# Altium PCB BrightnessControl.PcbDoc
Units mm, origin at the board's own origin, x right, y up, seen from the top; angles counter-clockwise.
Board outline 30.2 x 26.52 mm, 2 copper layers (Top Layer, Bottom Layer); 10 components, 10 nets, 30 pads, 2 vias.
Unrouted connection lines stored in the file: 1.
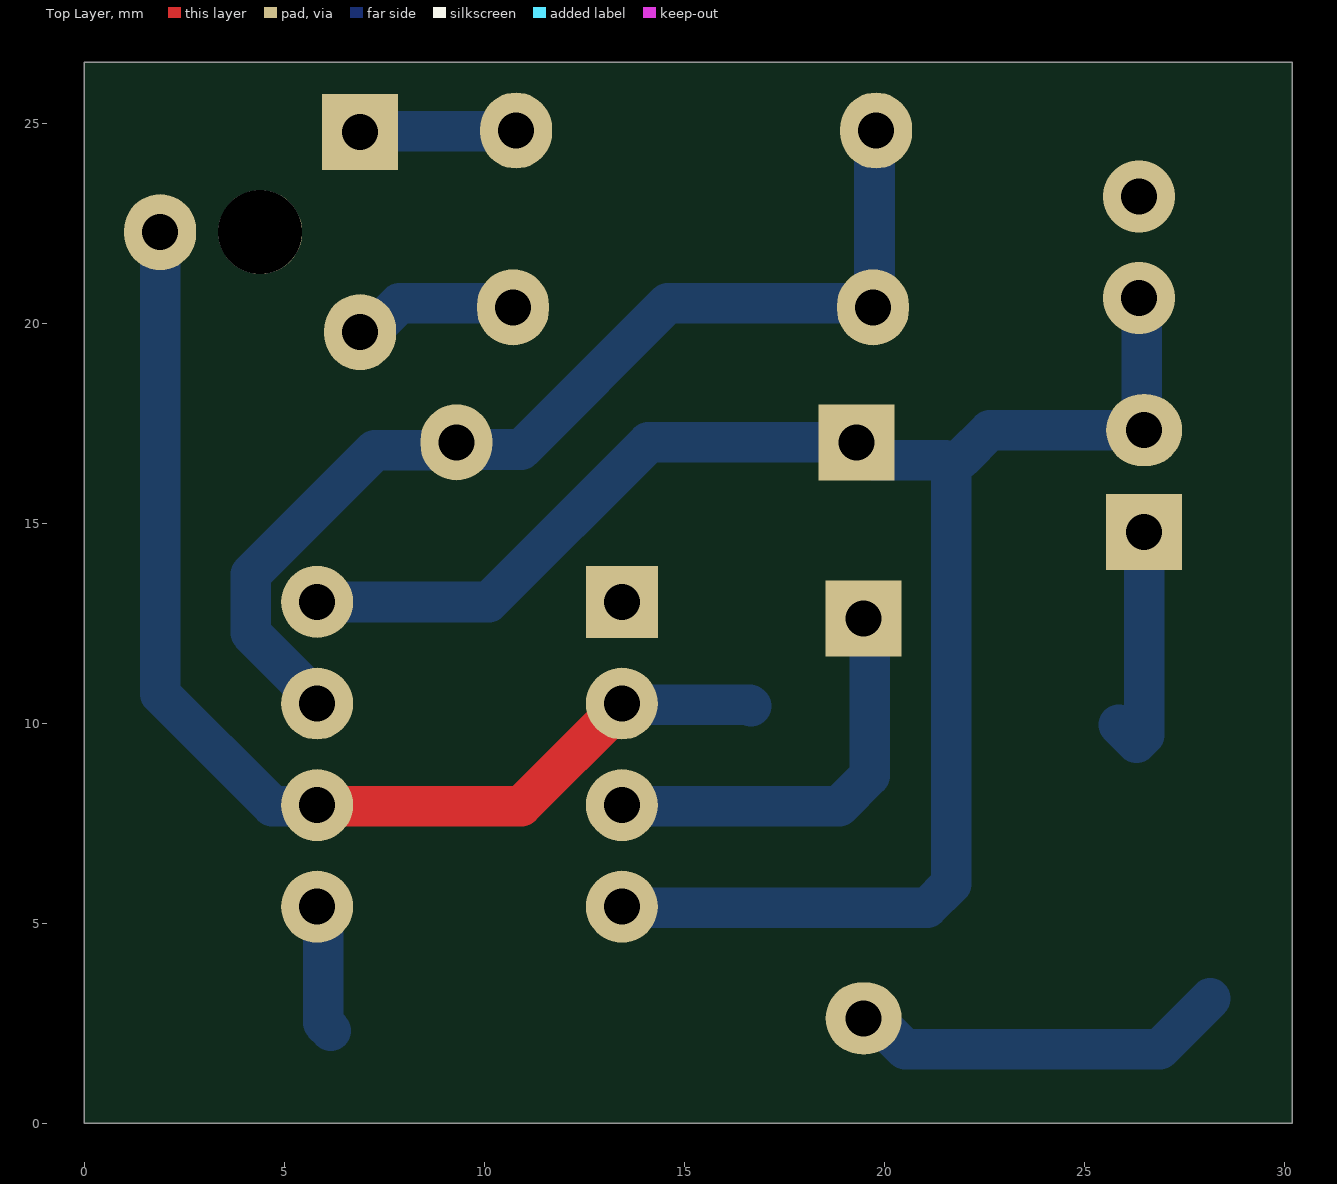
[diagram p0: Top Layer view]
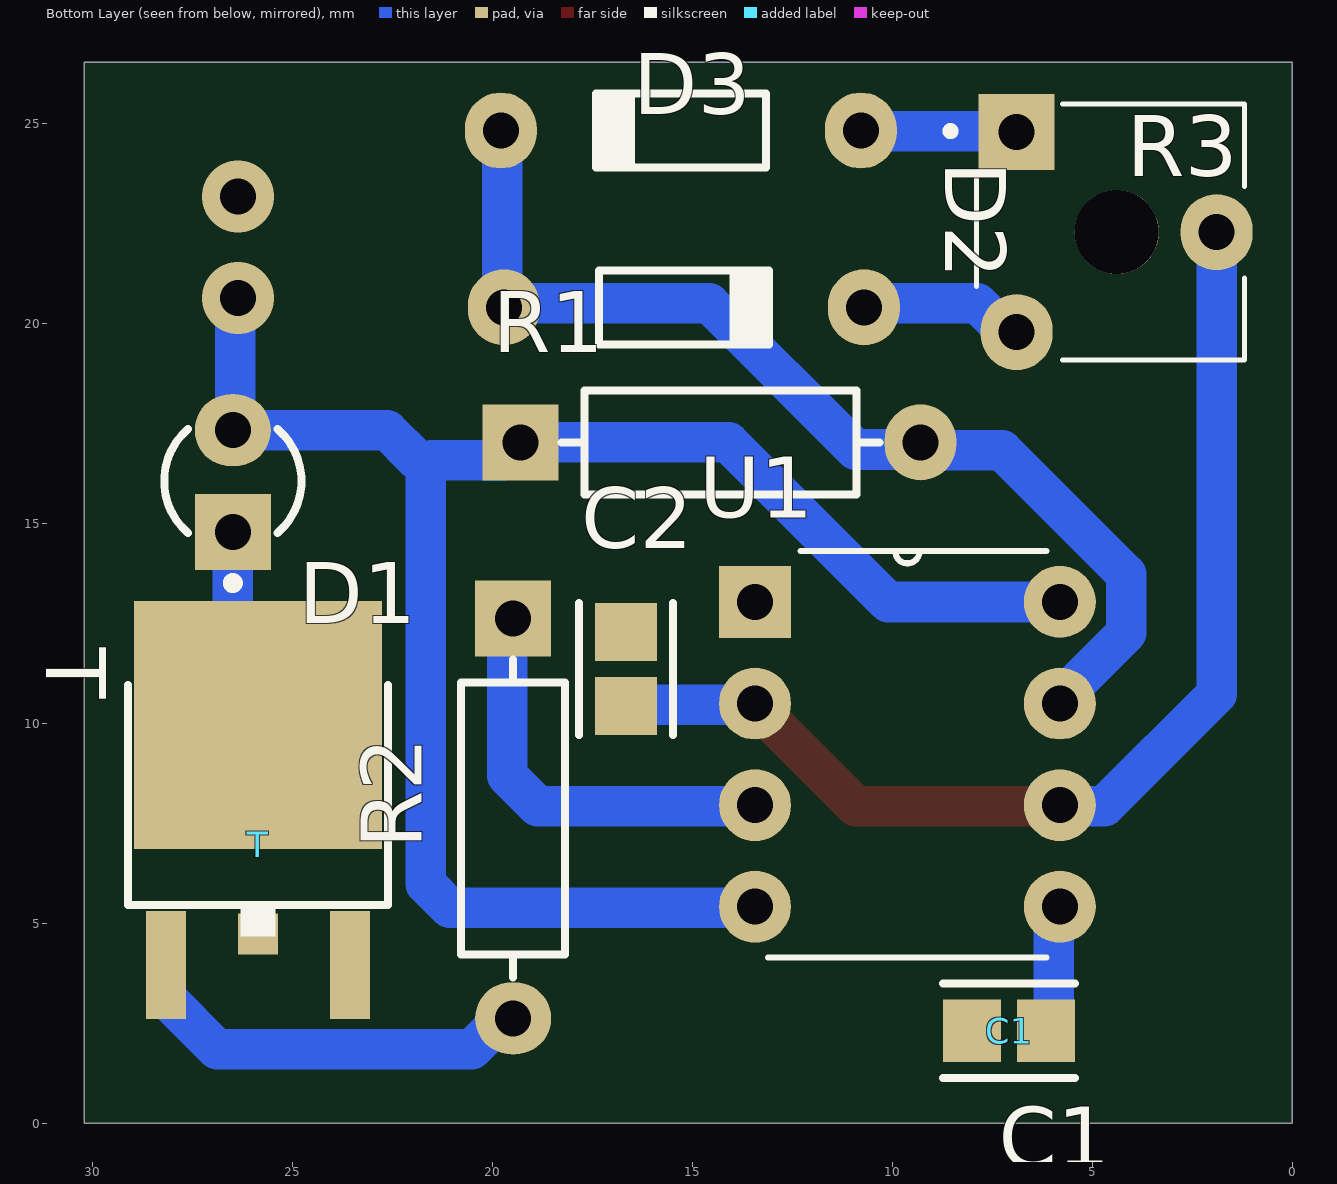
[diagram p1: Bottom Layer view, seen from below]
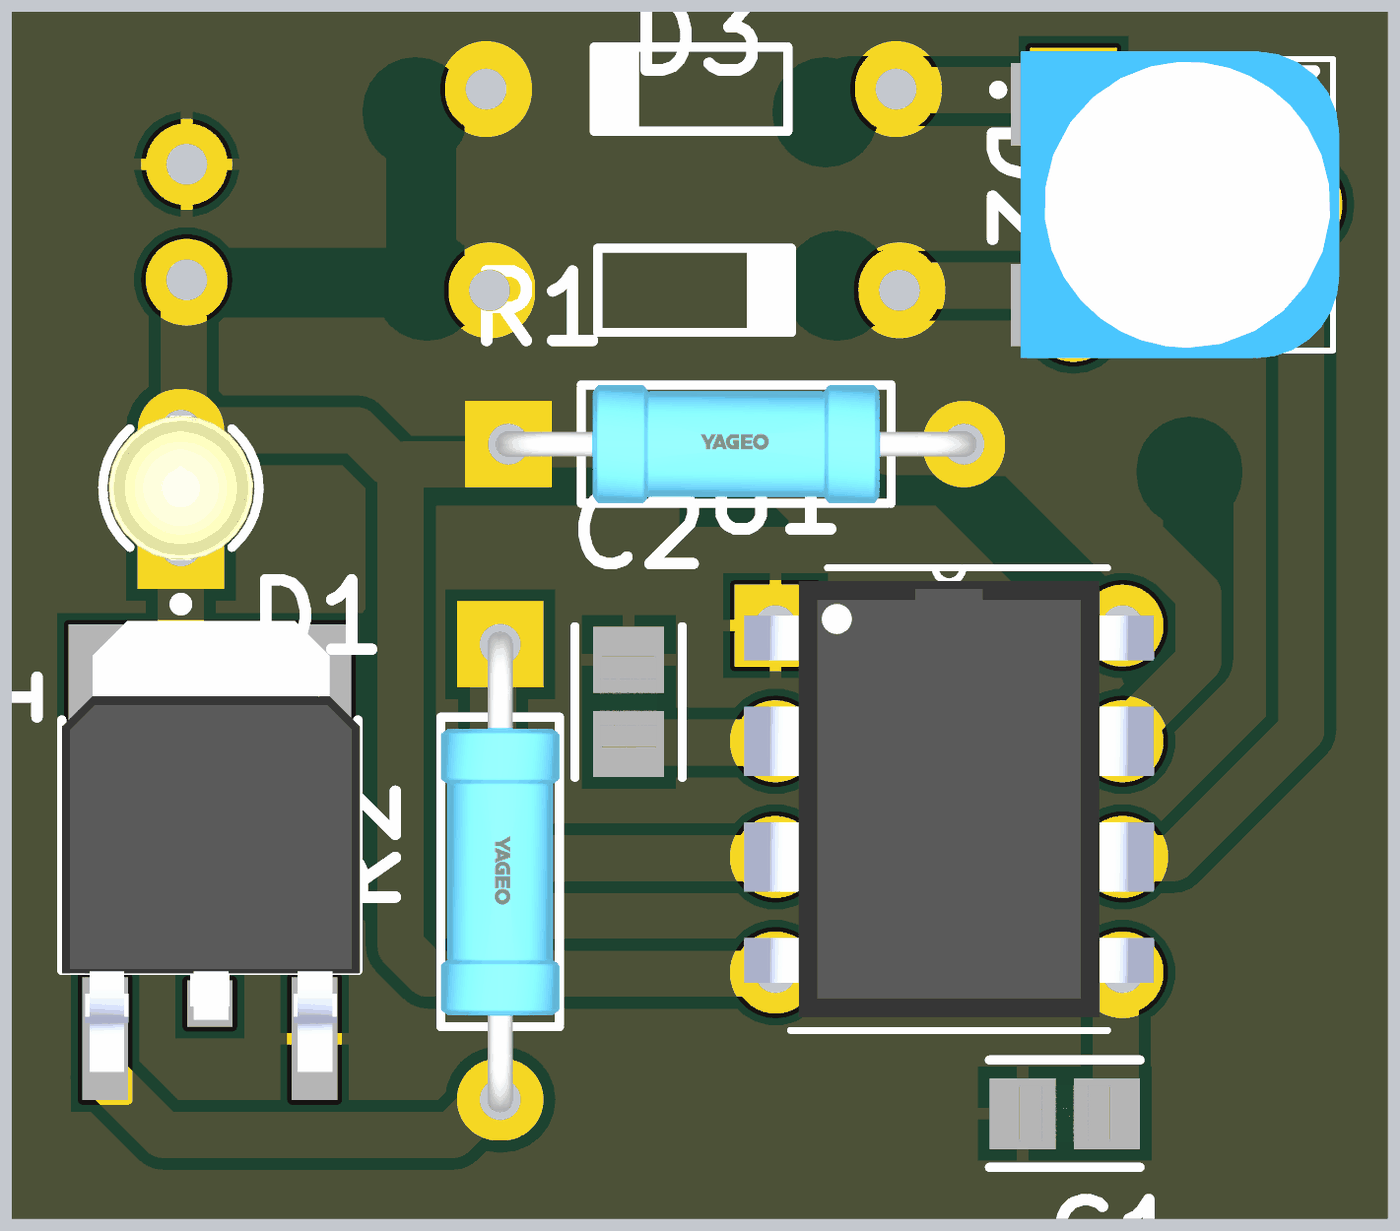
[diagram p2: 3D render of the assembled board from below, using the file's embedded part models]

## Layer stack, top to bottom
Top Solder: solder mask 0.0102, Solder Resist, Dk 3.5
Top Layer: signal copper 0.0356
Dielectric 1: dielectric 0.32, FR-4, Dk 4.8
Bottom Layer: signal copper 0.0356
Bottom Solder: solder mask 0.0102, Solder Resist, Dk 3.5

## Board outline
0,0 30.201,0 30.201,26.518 0,26.518

## Design rules (kind name [scope] priority, off if disabled: settings)
Clearance [All] p1: gap=0.254 ignorepadtopadclearanceinfootprint=FALSE except(0: Arc-Hole Track-Hole SMDPad-Hole THPad-Hole Via-Hole Fill-Hole Poly-Hole Region-Hole Text-Hole)
PolygonConnect [All] p1: connectstyle=Relief reliefconductorwidth=0.254 reliefentries=4 polygonreliefangle="90 Angle" airgapwidth=0.254
RoutingVias [All] p1: holewidth=0.711 width=1.27 viastyle="Through Hole" minholewidth=0.711 minwidth=1.27 maxholewidth=0.711 maxwidth=1.27
SolderMaskExpansion [All] p1: expansion=0.102 istentingtop=FALSE
Width [All] p1: maxlimit=2.54 minlimit=0.254 preferedwidth=0.762 minimp=50.000000 maximp=50.000000 favimp=50.000000
30 further rules are at their usual default settings.

## Components (designator, comment, footprint, x,y, rotation, side; value= is the part's Value field where it differs from the comment)
C1 "CL21A335KPFNNNG" FP-CL21-IPC_A 7.087,2.311 r180 bottom
C2 "CL21A335KPFNNNG" FP-CL21-IPC_A 16.662,11.354 r90 bottom
D1 "HLMP-1719" FP-HLMP-1719-MFG 26.492,16.053 r90 bottom
D2 "1N4148" NXP-SOD27-2_V 15.291,24.816 r0 bottom
D3 "1N4148" NXP-SOD27-2_V 15.215,20.396 r180 bottom
R1 "1K" FP-MFR-25-MFG 14.3,17.018 r180 bottom value=1.18kΩ
R2 "MFR-25FBF52-1K18" FP-MFR-25-MFG 19.482,7.62 r270 bottom value=1.18kΩ
R3 "RM065" RM065 4.394,22.276 r180 bottom
T "70T03GH" TO252-3 25.857,8.207 r180 bottom
U1 "NE555N" DIP8 9.627,9.22 r180 bottom

## Footprints (in the part's own frame and the unit in brackets; to place one, negate y for a bottom-side part, rotate by r counter-clockwise, add the part's x,y. Pads: shape width x height; smd on the part's side, far side on the other; paste and mask are expansions set on the pad)
DIP8 [mm]
  rect 1.8x1.8 hole 0.9: 1(-3.81,3.81)
  round 1.8 hole 0.9: 2(-3.81,1.27) 3(-3.81,-1.27) 4(-3.81,-3.81) 5(3.81,-3.81) 6(3.81,-1.27) 7(3.81,1.27) 8(3.81,3.81)
  silkscreen extent -3.48,-5.08 3.48,5.08, body extent -5.46,-4.79 5.46,4.79, height 4.97
FP-CL21-IPC_A [mm]
  rect 1.455x1.556 smd paste+0 mask+0: 1(-0.926,0) 2(0.926,0)
  silkscreen extent -1.65,-1.18 1.65,1.18, body extent -1,-0.63 1,0.63, height 1.45
FP-HLMP-1719-MFG [mm]
  rect 1.9x1.9 hole 0.9 paste-1000 mask+0: 1(-1.27,0)
  oval 1.8x1.9 hole 0.9 paste-1000 mask+0: 2(1.27,0)
  silkscreen extent -2.67,-1.71 1.3,1.71, body extent -1.6,-1.59 1.6,1.59, height 8.47
FP-MFR-25-MFG [mm]
  rect 1.9x1.9 hole 0.9 paste-1000 mask+0: 1(-5,0)
  oval 1.8x1.9 hole 0.9 paste-1000 mask+0: 2(5,0)
  silkscreen extent -3.98,-1.3 3.98,1.3, body extent -5.28,-1.3 5.28,1.3, height 2.6
NXP-SOD27-2_V [mm] "SOD27, 2-Leads, Dia 1.85mm, Body Length 4.25mm, Pin Spacing 9mm"
  oval 1.8x1.9 hole 0.9: 1(-4.5,0) 2(4.5,0)
  silkscreen extent -2.12,-0.93 2.12,0.92, body extent -4.78,-0.93 4.78,0.92, height 1.85
RM065 [mm]
  rect 1.9x1.9 hole 0.9: 1(-2.5,2.5)
  oval 1.8x1.9 hole 0.9: 2(2.5,0) 3(-2.5,-2.5)
  round 2.1 hole 2.1 unplated: ""(0,0)
  silkscreen extent -4.26,-3.2 3.2,3.2, body extent -3.88,-3.37 3.75,3.37, height 6.37
TO252-3 [mm]
  rect 1x2.7 smd: 1(-2.3,-4.25) 3(2.3,-4.25)
  rect 1x1.02 smd: 2(0,-3.48)
  rect 6.2x6.2 smd: PAD(0,1.75)
  silkscreen extent -3.25,-3.54 3.25,2.75, body extent -3.25,-4.98 3.3,4.93, height 2.4

## Part data
C1 C2: library part CMP-13271-000579-1, "CL21 Series 0805 3.3uF 10V ±10% Tolerance X5R Multilayer Ceramic Chip Capacitor", Capacitance=3.3uF, Case Code (Imperial)=0805, Case Code (Metric)=2012, Dielectric=X5R, Max Operating Temperature=85°C, Min Operating Temperature=-55°C, Package Quantity=3000, Tolerance=10%, Voltage Rating=10V, Case/Package=0805, Depth=1.25mm, Length=0.079inch, Mount="Surface Mount", Packaging="Tape and Reel", Thickness=0.053inch, Width=0.049inch
D1: library part CMP-2000-06410-2, "LED YELLOW DIFFUSED T-1 T/H", Colour=Yellow, Forward Current=2mA, Forward Voltage=1.8V, Manufacturer=Broadcom, Package=0, Power Dissipation=17.5mW, Reverse Voltage=5V, Temperature="-40°C to +100°C", Temperature Range High=+100°C, Temperature Range Low=-40°C, Automotive=No, Category=Diode, ComponentLink2Description=Datasheet, ComponentLink2URL=https://docs.broadcom.com/docs/AV02-1557EN, Device Class L1=Optoelectronics, Device Class L2=LEDs, Device Class L3=unset, Digikey Description="LED YELLOW DIFFUSED T-1 T/H", Lead Free=Yes, Led Orientation=Straight, Luminous Intensity=2.1mcd, Manufacturer Part Number=HLMP-1719, Mouser Description="Standard LEDs - Through Hole Yellow Diffused 585nm 2.1mcd", Octopart=https://octopart.com/hlmp-1719-broadcom-71130405, RoHS=TRUE, Viewing Angle=50°, Wavelength=585nm
D2 D3: library part CMP-0648-00002-1, "High-speed Diode, 100 V, 450 mA, 2-Pin SOD27, RoHS", Manufacturer="NXP Semiconductors", Cd="4 pF Max.", ComponentLink1Description="Manufacturer URL", ComponentLink1URL=http://www.nxp.com/, ComponentLink2Description=Datasheet, ComponentLink2URL=http://www.nxp.com/documents/data_sheet/1N4148_1N4448.pdf, ComponentLink3Description="Package Specification", ComponentLink3URL=http://www.nxp.com/documents/data_sheet/1N4148_1N4448.pdf, Configuration=Single, DatasheetVersion=Aug-04, IF="200 mA Max.", IFRM="450 mA", IFSM="4 A Max.", IR (VR="20 V)=25 nA", Mounting Technology="Through Hole", PackageDescription="2-Pin Hermetically Sealed Glass Package, Axial Leaded, Dia 1.85 mm, Body Length 4.25 mm, Lead Spread 25.4 mm", PackageReference=SOD27, PackageVersion=Aug-04, PartNumber=1N4148, RoHS=TRUE, Trr="4 ns Max.", VF (IF="10 mA)=1 V", VR="100 V Max."
R1: library part CMP-03413-000001-1, "RES 1.18K OHM 1/4W 1% AXIAL", Manufacturer=Yageo, Manufacturer Part Number=MFR-25FBF52-1K18, Package=MFR-25, Power Rating=0.25W, Resistance=1.18kΩ, Temperature="-55°C to +155°C", Temperature Coefficient=100ppm/°C, Temperature Range High=+155°C, Temperature Range Low=-55°C, Tolerance=1%, Voltage Rating=250V, Automotive=No, Category=Res, ComponentLink2Description=Datasheet, ComponentLink2URL=https://www.yageo.com/upload/media/product/products/datasheet/lr/Yageo_LR_MFR_1.pdf, Composition="Metal Film", Device Class L1="Passive Components", Device Class L2=Resistors, Device Class L3="Through-Hole Resistors", Digikey Description="RES 1.18K OHM 1/4W 1% AXIAL", Height=2.6mm, Ipc Land Pattern Name=RESAD1000W75L680D260, Lead Free=Yes, Mouser Description="Metal Film Resistors 1.18K OHM 1/4W 1%", Octopart=https://octopart.com/mfr-25fbf52-1k18-yageo-56251681, RoHS=TRUE, Series=MFR
R2: library part CMP-03413-000001-1, "RES 1.18K OHM 1/4W 1% AXIAL", Manufacturer=Yageo, Package=MFR-25, Power Rating=0.25W, Resistance=1.18kΩ, Temperature="-55°C to +155°C", Temperature Coefficient=100ppm/°C, Temperature Range High=+155°C, Temperature Range Low=-55°C, Tolerance=1%, Voltage Rating=250V, Automotive=No, Category=Res, ComponentLink2Description=Datasheet, ComponentLink2URL=https://www.yageo.com/upload/media/product/products/datasheet/lr/Yageo_LR_MFR_1.pdf, Composition="Metal Film", Device Class L1="Passive Components", Device Class L2=Resistors, Device Class L3="Through-Hole Resistors", Digikey Description="RES 1.18K OHM 1/4W 1% AXIAL", Height=2.6mm, Ipc Land Pattern Name=RESAD1000W75L680D260, Lead Free=Yes, Manufacturer Part Number=MFR-25FBF52-1K18, Mouser Description="Metal Film Resistors 1.18K OHM 1/4W 1%", Octopart=https://octopart.com/mfr-25fbf52-1k18-yageo-56251681, RoHS=TRUE, Series=MFR
R3: "5 kOhms 0.1W, 1/10W PC Pins Through Hole Trimmer Potentiometer Carbon 1 Turn Top Adjustment", Package="DO-214 Bourns Inc.", Availability=Bad, Check_prices=https://www.snapeda.com/parts/3318F-1-502/Bourns/view-part/3658500/?ref=eda, MF="Bourns Inc.", MP=3318F-1-502, Price=None, SnapEDA_Link=https://www.snapeda.com/parts/3318F-1-502/Bourns/view-part/3658500/?ref=snap
T: "RoHS Compliant", Package="TO-252 Infineon", Availability=Unavailable, MF="Infineon Technologies", MP=IRLR2905TRPBF, Price=None, SnapEDA_Link=https://www.snapeda.com/parts/IRLR2905TRPBF/Infineon%20Technologies/view-part/836333/?ref=snap
U1: "555 Type, Timer/Oscillator _Single_ IC 8-DIP", Package="DIP-8 Texas Instruments", Availability=Unavailable, MF="ON Semiconductor", MP=NE555N, Price=None, SnapEDA_Link=https://www.snapeda.com/parts/NE555N/ON%20Semiconductor/view-part/2757993/?ref=snap

## Via types
v1: diameter 1.8, hole 0.9, Top Layer to Bottom Layer, 2 vias

## Nets (pads, with @x,y where several pads share a name; then routed paths per layer and width w, separated by ;. In a path a pad name is that pad's centre, name@x,y a point inside that pad or via, vN(x,y) a via of type N, cw(c..) or ccw(c..) an arc to the next point about the centre after c; other vN are vias at no path point)
+12: D1.2 R1.1 U1.4 U1.8 | length 44.9
  Bottom Layer w1.016: U1.8 10.109,13.03 14.097,17.018 R1.1 19.742,16.576 21.524,16.576 21.666,16.434 21.666,5.98 21.071,5.385 13.792,5.385 13.462,5.385 U1.4 ; 21.924,16.616 22.631,17.323 D1.2 26.429,17.386 26.429,20.561 v1(26.365,20.625)
GND: C1.1 C2.2 T.3 U1.1
  other v1: 26.365,23.165
NetC1_2: C1.2 U1.5 | length 3.2
  Bottom Layer w1.016: U1.5 5.967,5.26 5.967,2.506 C1.2
NetC2_1: C2.1 R3.2 U1.2 U1.6 | length 28.6
  Top Layer w1.016: U1.6 6.153,7.95 6.179,7.925 10.921,7.925 13.437,10.44 U1.2
  Bottom Layer w1.016: R3.2 1.894,10.73 4.699,7.925 5.791,7.925 U1.6 ; U1.2 13.468,10.459 16.631,10.459 C2.1
NetD1_1: D1.1 T.2 T.PAD | length 6
  Bottom Layer w1.016: T.PAD 26.302,9.512 26.492,9.703 D1.1
NetD2_1: D2.1 R3.1 | length 3.9
  Bottom Layer w1.016: R3.1 6.914,24.796 10.771,24.796 D2.1
NetD2_2: D2.2 D3.1 R1.2 U1.7 | length 26.8
  Bottom Layer w1.016: U1.7 5.817,10.594 4.155,12.256 4.155,13.719 7.254,16.818 9.1,16.818 9.123,16.841 10.923,16.841 14.58,20.498 19.613,20.498 D3.1 19.753,20.434 19.753,24.778 D2.2
NetD3_2: D3.2 R3.3 | length 4.2
  Bottom Layer w1.016: R3.3 7.156,19.776 7.878,20.498 10.613,20.498 D3.2
NetR2_1: R2.1 U1.3 | length 10.5
  Bottom Layer w1.016: U1.3 13.462,7.925 13.792,7.925 18.872,7.925 19.634,8.687 19.634,12.518 19.583,12.569 19.533,12.569 R2.1
NetR2_2: R2.2 T.1 | length 9.5
  Bottom Layer w1.016: R2.2 19.744,2.62 20.519,1.845 26.879,1.845 T.1@28.149,3.115
pads on no net: R3.

## Polygon pours and split planes (outlines as drawn)
GND on Bottom Layer "NONET_L02_P000" (solid, remove dead copper, shelved, pour order 0): 0,26.518 30.201,26.518 30.201,0 0,0